# Altium PCB holoboard.PcbDoc
Units mil, origin at the board's own origin, x right, y up, seen from the top; angles counter-clockwise.
Board outline 3937.01 x 3937.01 mil, 2 copper layers (Top Layer, Bottom Layer); 69 components, 62 nets, 320 pads, 0 vias.
Unrouted connection lines stored in the file: 10.
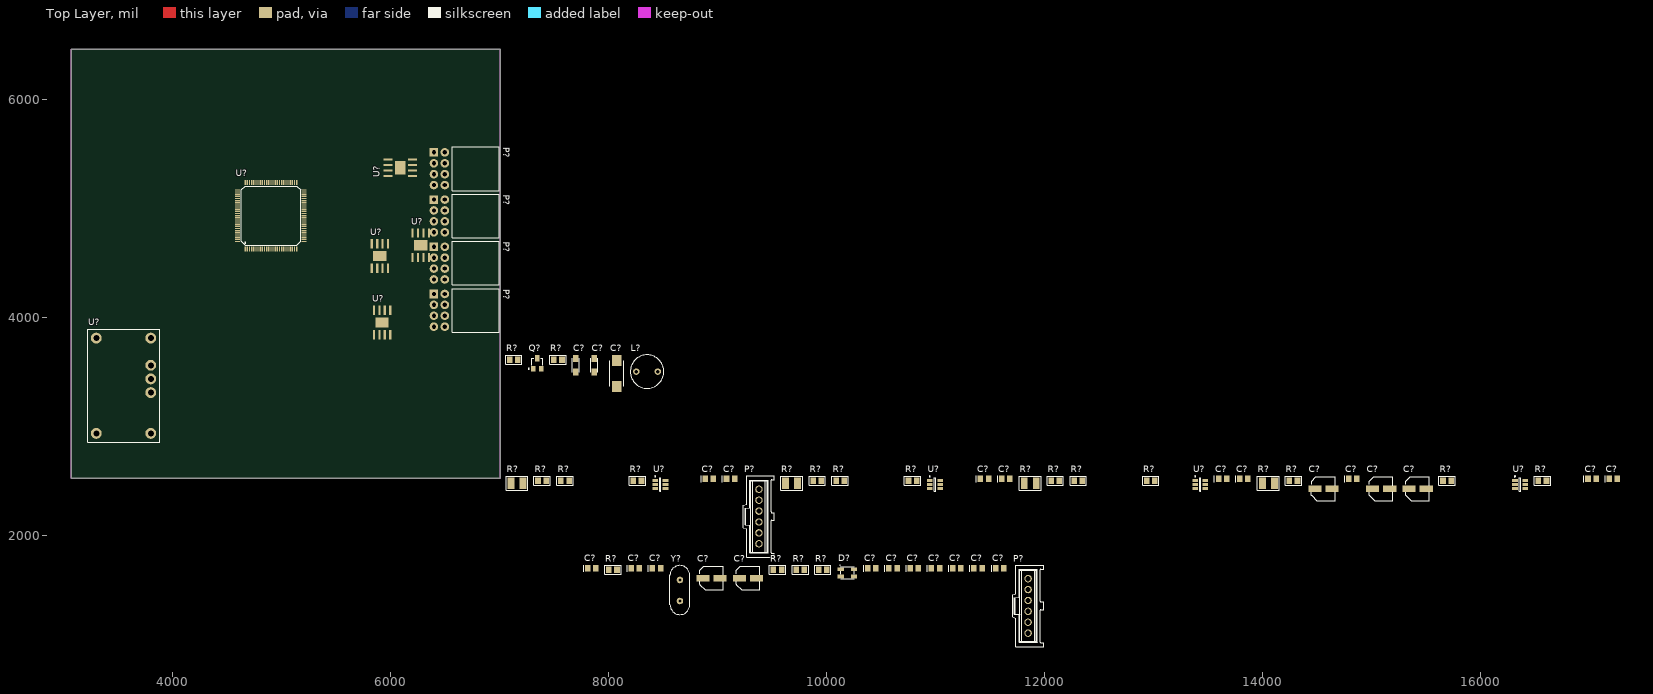
[diagram p0: Top Layer view]
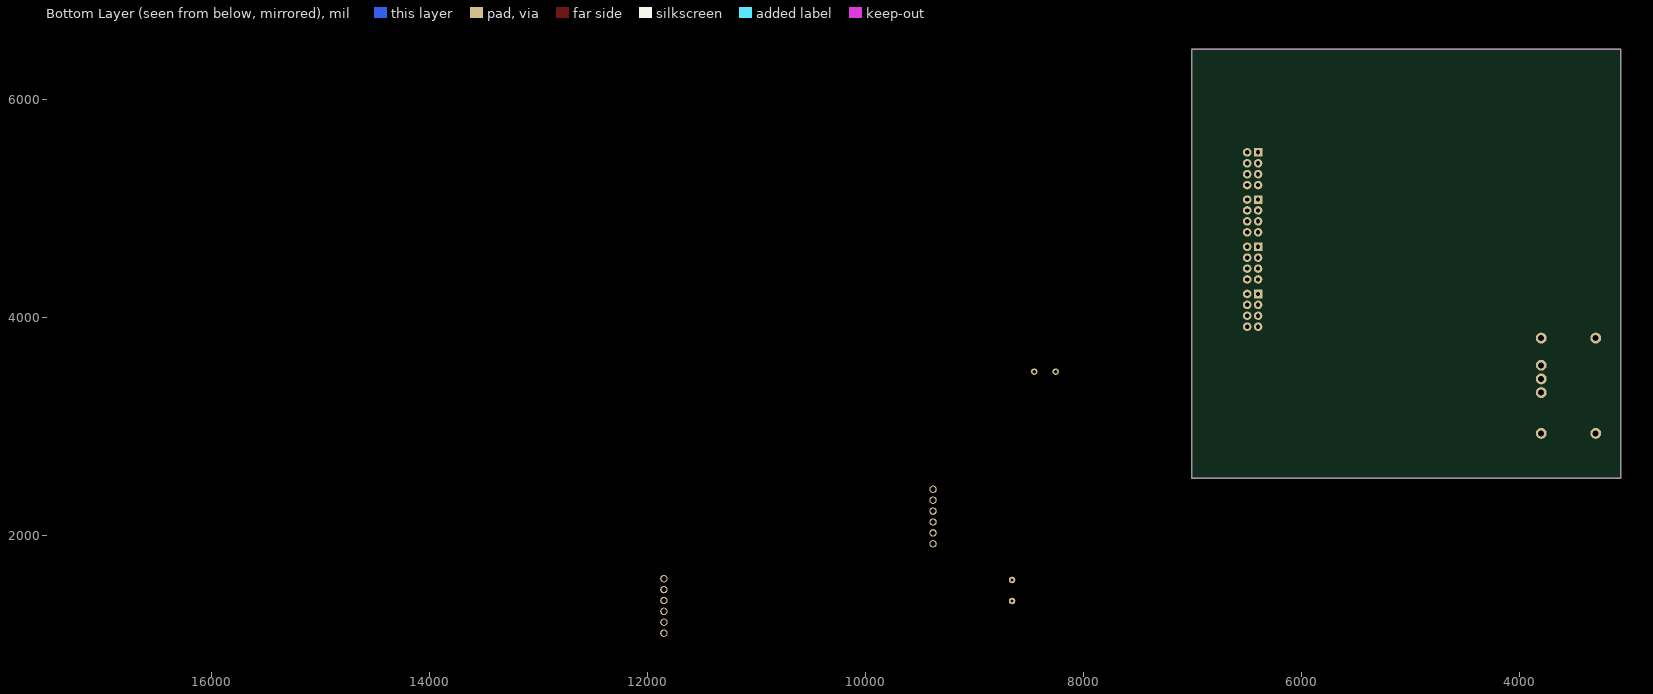
[diagram p1: Bottom Layer view, seen from below]

## Layer stack, top to bottom
Top Layer: signal copper 1.4
Dielectric: dielectric 12.6, FR-4, Dk 4.8
Bottom Layer: signal copper 1.4

## Board outline
3070.87,2519.68 7007.87,2519.68 7007.87,6456.69 3070.87,6456.69

## Design rules (kind name [scope] priority, off if disabled: settings)
Clearance [All] p1: gap=10
PolygonConnect [All] p1: connectstyle=Relief reliefconductorwidth=10 reliefentries=4 polygonreliefangle="90 Angle"
RoutingVias [All] p1: holewidth=28 width=50 viastyle="Through Hole" minholewidth=28 minwidth=50 maxholewidth=28 maxwidth=50
SilkscreenOverComponentPads [All] p1: minsilkscreentomaskgap=10
SolderMaskExpansion [All] p1: expansion=4
Width [All] p1: maxlimit=10 minlimit=10 preferedwidth=10
27 further rules are at their usual default settings.

## Classes and differential pairs
component class Holoboard: C? D? P? R? U? Y?
component class Holoboard_power_supply: C? L? Q? R? U?
component class Holoboard_motor_interface: C? P? R? U?

## Components (designator, comment, footprint, x,y, rotation, side; value= is the part's Value field where it differs from the comment)
C? "Cap" C0805 10415,1695 r0 top
C? "Cap" C0805 10805,1695 r0 top
C? "Cap" C0805 11000,1695 r0 top
C? "Cap" C0805 11195,1695 r0 top
C? "Cap" C0805 11390,1695 r0 top
C? "Cap" C0805 10610,1695 r0 top
C? "Cap" C0805 11590,1695 r0 top
C? "Cap Pol" "ALUMINIUM Boîtier B" 8945,1605 r0 top
C? "Cap Pol" "ALUMINIUM Boîtier B" 9280,1605 r0 top
C? "Cap" C0805 8245,1695 r0 top
C? "Cap" C0805 8440,1695 r0 top
C? "Cap" C0805 7845,1695 r0 top
C? "Cap" C0805 17025,2515 r0 top
C? "Cap" C0805 13830,2515 r0 top
C? "Cap" C0805 11645,2515 r0 top
C? "Cap" C0805 8925,2515 r0 top
C? "Cap" C0805 14830,2515 r0 top
C? "Cap Pol" "ALUMINIUM Boîtier B" 15090,2425 r0 top
C? "Cap" C0805 13635,2515 r0 top
C? "Cap" C0805 11450,2515 r0 top
C? "Cap" C0805 9120,2515 r0 top
C? "Cap" C0805 17220,2515 r0 top
C? "Cap Pol" "ALUMINIUM Boîtier B" 14560,2425 r0 top
C? "Cap Pol" "ALUMINIUM Boîtier B" 15425,2425 r0 top
C? "Cap Pol" "Boitier tantale C" 8075,3365 r90 top
C? "Cap" "Boitier tantale A" 7700,3495 r90 top
C? "Cap" "Boitier tantale A" 7870,3495 r90 top
D? "CLV1A-FKB" "WL-SFTW SMD" 10130,1620 r0 top
L? "Inductor" 744772010 8255,3500 r0 top
P? "SWD" "Connecteur 6pts" 11850,1600 r90 top
P? "Header 4X2" 114-15030 6397.64,5078.74 r270 top
P? "Header 4X2" 114-15030 6397.64,4645.67 r270 top
P? "Header 4X2" 114-15030 6397.64,4212.6 r270 top
P? "Header 4X2" 114-15030 6397.64,5511.81 r270 top
P? "JTAG" "Connecteur 6pts" 9380,2420 r90 top
Q? "SSM3K15FS" SOT-23 7345,3575 r0 top
R? "Res2" 0805 8040,1680 r0 top
R? "Res2" 0805 9760,1680 r0 top
R? "Res2" 0805 9965,1680 r0 top
R? "Res2" 0805 9550,1680 r0 top
R? "Res2" 0805 12975,2500 r0 top
R? "Res2" 0805 12310,2500 r0 top
R? "Res2" 0805 12100,2500 r0 top
R? "Res2" 1210 11870,2475 r0 top
R? "Res2" 0805 10790,2500 r0 top
R? "Res2" 0805 10125,2500 r0 top
R? "Res2" 0805 9915,2500 r0 top
R? "Res2" 1210 9680,2475 r0 top
R? "Res2" 0805 8265,2500 r0 top
R? "Res2" 0805 7600,2500 r0 top
R? "Res2" 0805 7390,2500 r0 top
R? "Res2" 1210 7160,2475 r0 top
R? "Res2" 0805 16570,2500 r0 top
R? "Res2" 0805 15695,2500 r0 top
R? "Res2" 0805 14285,2500 r0 top
R? "Res2" 1210 14055,2475 r0 top
R? "Res2" 0805 7130,3610 r0 top
R? "Res2" 0805 7535,3610 r0 top
U? "STM32F746" LQFP100 4665.35,4625.98 r0 top
U? "SN74LVC2G06" SOT23-6_M 16365,2465 r0 top
U? "SN74LVC2G06" SOT23-6_M 13430,2465 r0 top
U? "SN74LVC2G06" SOT23-6_M 10995,2465 r0 top
U? "DRV8872" DDA 5826.77,4448.82 r90 top
U? "DRV8872" DDA 6200.79,4547.24 r90 top
U? "DRV8872" DDA 6200.79,5295.28 r180 top
U? "DRV8872" DDA 5846.46,3838.58 r90 top
U? "SN74LVC2G06" SOT23-6_M 8475,2465 r0 top
U? "PTN78060W" EUW 3799.21,2933.07 r90 top
Y? "16MHz" HC49US 8655,1495 r90 top

## Footprints (in the part's own frame and the unit in brackets; to place one, negate y for a bottom-side part, rotate by r counter-clockwise, add the part's x,y. Pads: shape width x height; smd on the part's side, far side on the other; paste and mask are expansions set on the pad)
114-15030 [mm]
  rect 2x2 hole 1: 1(0,0)
  round 2 hole 1: 2(0,2.54) 3(2.54,0) 4(2.54,2.54) 5(5.08,0) 6(5.08,2.54) 7(7.62,0) 8(7.62,2.54)
  silkscreen extent -1.27,4.32 8.89,15.28, body extent -1.29,-0.32 8.87,15.33, height 7.57
0805 [mm] "Chip Capacitor; Body 2.0 x 1.2 mm (LxW typ)"
  rect 1.3x1.5 smd: 1(-0.95,0) 2(0.95,0)
  silkscreen extent -1.9,-1.05 1.9,1.05, body extent -1.02,-0.57 0.98,0.68, height 0.78
1210 [mm]
  rect 1.6x2.7 smd: 1(-1.4,0) 2(1.4,0)
  silkscreen extent -2.54,-1.65 2.54,1.65
744772010 [mm]
  round 1.5 hole 0.8: 1(0,0) 2(5,0)
  silkscreen extent -1.4,-3.9 6.4,3.9, body extent -1.41,-3.91 6.41,3.91, height 9.5
"ALUMINIUM Boîtier B" [mm]
  rect 3.05x1.5 smd: 1(-2,0) 2(2,0)
  silkscreen extent -2.79,-2.75 2.75,2.75, body extent -2.8,-2.75 2.75,2.75, height 5.4
"Boitier tantale A" [mm]
  rect 1.6x1.3 smd: 1(0,0) 2(3.2,0)
  silkscreen extent 0,-0.8 3.2,0.8, body extent -0.8,-0.9 4,0.9, height 1.8
"Boitier tantale C" [mm]
  rect 2.6x2.2 smd: 1(0,0) 2(6,0)
  silkscreen extent 0,-1.6 6,1.6, body extent -0.8,-1.75 6.8,1.76, height 2.79
C0805 [mm] "Chip Capacitor; Body 2.0 x 1.2 mm (LxW typ)"
  rect 1.3x1.5 smd: 1(-0.95,0) 2(0.95,0)
  silkscreen extent -1.9,-0.75 -1.9,0.75, body extent -1,-0.62 1,0.63, height 0.78
"Connecteur 6pts" [mil]
  round 68 hole 48: 1(0,0) 2(-100,0) 3(-200,0) 4(-300,0) 5(-400,0) 6(-500,0)
  silkscreen extent -623,-142 124,142
DDA [mm] "PowerPAD PLASTIC SMALL-OUTLINE"
  rect 2.2x0.5 smd paste-0.05 mask+0.05: 1(0,0) 2(0,-1.27) 3(0,-2.54) 4(0,-3.81) 5(5.715,-3.81) 6(5.715,-2.54) 7(5.715,-1.27) 8(5.715,0)
  rect 2.4x3.1 smd paste-0.05 mask+0.275: PPAD(2.86,-1.9)
  body extent -0.24,-4.4 5.96,0.6, height 1.53
EUW [mil]
  round 100 hole 55: 1(0,500) 2(0,0) 3(375,0) 4(500,0) 5(625,0) 6(875,0) 7(875,500)
  silkscreen extent -80,-80 955,580, body extent -85,-85 960,585, height 315
HC49US [mil]
  round 60 hole 27.56: 1(-100,0) 2(92.91,0)
  silkscreen extent -224,-92 226,92, body extent -224,-91 225,91, height 118
LQFP100 [mm] "14 x 14 mm 100-pin low-profile"
  rect 0.3x1.2 smd paste-0.05 mask+0.05: 1(0,0) 2(0.5,0) 3(1,0) 4(1.5,0) 5(2,0) 6(2.5,0) 7(3,0) 8(3.5,0) 9(4,0) 10(4.5,0) 11(5,0) 12(5.5,0) 13(6,0) 14(6.5,0) 15(7,0) 16(7.5,0) 17(8,0) 18(8.5,0) 19(9,0) 20(9.5,0) 21(10,0) 22(10.5,0) 23(11,0) 24(11.5,0) 25(12,0) 51(12,15.5) 52(11.5,15.5) 53(11,15.5) 54(10.5,15.5) 55(10,15.5) 56(9.5,15.5) 57(9,15.5) 58(8.5,15.5) 59(8,15.5) 60(7.5,15.5) 61(7,15.5) 62(6.5,15.5) 63(6,15.5) 64(5.5,15.5) 65(5,15.5) 66(4.5,15.5) 67(4,15.5) 68(3.5,15.5) 69(3,15.5) 70(2.5,15.5) 71(2,15.5) 72(1.5,15.5) 73(1,15.5) 74(0.5,15.5) 75(0,15.5)
  rect 1.2x0.3 smd paste-0.05 mask+0.05: 26(13.75,1.75) 27(13.75,2.25) 28(13.75,2.75) 29(13.75,3.25) 30(13.75,3.75) 31(13.75,4.25) 32(13.75,4.75) 33(13.75,5.25) 34(13.75,5.75) 35(13.75,6.25) 36(13.75,6.75) 37(13.75,7.25) 38(13.75,7.75) 39(13.75,8.25) 40(13.75,8.75) 41(13.75,9.25) 42(13.75,9.75) 43(13.75,10.25) 44(13.75,10.75) 45(13.75,11.25) 46(13.75,11.75) 47(13.75,12.25) 48(13.75,12.75) 49(13.75,13.25) 50(13.75,13.75) 76(-1.75,13.75) 77(-1.75,13.25) 78(-1.75,12.75) 79(-1.75,12.25) 80(-1.75,11.75) 81(-1.75,11.25) 82(-1.75,10.75) 83(-1.75,10.25) 84(-1.75,9.75) 85(-1.75,9.25) 86(-1.75,8.75) 87(-1.75,8.25) 88(-1.75,7.75) 89(-1.75,7.25) 90(-1.75,6.75) 91(-1.75,6.25) 92(-1.75,5.75) 93(-1.75,5.25) 94(-1.75,4.75) 95(-1.75,4.25) 96(-1.75,3.75) 97(-1.75,3.25) 98(-1.75,2.75) 99(-1.75,2.25) 100(-1.75,1.75)
  silkscreen extent -0.9,0.85 12.9,14.65, body extent -2,-0.25 14,15.75, height 1.6
SOT23-6_M [mm] "SOT23, 6-Leads, Body 2.9x1.6mm, Pitch 0.95mm, Lead Span 2.7mm, IPC Low Density"
  rect 1.3x0.7 smd: 1(-1.2,0.95) 2(-1.2,0) 3(-1.2,-0.95) 4(1.2,-0.95) 5(1.2,0) 6(1.2,0.95)
  silkscreen extent -1.32,-1.55 0.15,1.97, body extent -1.47,-1.52 1.53,1.48, height 1.3
SOT-23 [mm] "SOT-23; 3 Leads; Body 3.0 x 2.6 mm, inc. leads (LxW max)"
  rect 1x1.2 smd: 1(-0.95,-1.25) 2(0.95,-1.25)
  rect 1x1.5 smd: 3(0,1.25)
  silkscreen extent -2.07,-1.37 1.3,1.25, body extent -1.5,-1.15 1.5,1.35, height 1.05
"WL-SFTW SMD" [mm]
  rect 1.5x0.9 smd: 1(3.1,1.7) 2(3.1,0) 3(0,1.7) 4(0,0)
  silkscreen extent -0.17,-0.55 3.17,2.64

## Part data
C? C? C? C? C? C? C? C? C? C? C? C? C? C? C? C? C? C? C? C? C?: "Capacitor"
C? C? C? C? C? C?: "Polarized Capacitor"
P? P?: library part "Header 6", "Header, 6-Pin"
P? P? P? P?: "Header, 4-Pin, Dual row"
Q?: library part NMOS-2, "N-Channel Power MOSFET"
R? R? R? R? R? R? R? R? R? R? R? R? R? R? R? R? R? R? R? R? R? R?: "Resistor"
U? U? U? U?: "3.6A Brushed  DC Motor  Driver  With Fault Reporting"
Y?: library part XTAL, "Crystal Oscillator"

## Nets (pads, with @x,y where several pads share a name; then routed paths per layer and width w, separated by ;. In a path a pad name is that pad's centre, name@x,y a point inside that pad or via, vN(x,y) a via of type N, cw(c..) or ccw(c..) an arc to the next point about the centre after c; other vN are vias at no path point)
3V3: U?.15 U?.18 U?.19 U?.31 U?.50 U?.75 U?.100
5V: 
BOOT0: U?.94
GND: D?.2 Q?.3 U?.7@4783.46,4625.98 U?.22
"JTAG EN": U?.26
LED_B: 
LED_G: 
LED_R: 
MOT0_CHA: U?.32
MOT0_CHB: U?.30
MOT0_F\A\U\L\T\: 
MOT0_IN1: U?.29
MOT0_IN2: U?.28
MOT0_OUT+: 
MOT0_OUT-: 
MOT1_CHA: U?.27
MOT1_CHB: U?.25
MOT1_F\A\U\L\T\: 
MOT1_IN1: U?.23
MOT1_IN2: U?.21
MOT1_OUT+: 
MOT1_OUT-: 
MOT2_CHA: 
MOT2_CHB: U?.16
MOT2_F\A\U\L\T\: 
MOT2_IN1: U?.17
MOT2_IN2: 
MOT2_OUT+: 
MOT2_OUT-: 
MOT3_CHA: U?.11
MOT3_CHB: U?.10
MOT3_F\A\U\L\T\: 
MOT3_IN1: 
MOT3_IN2: 
MOT3_OUT+: 
MOT3_OUT-: 
MOT4_OUT+: U?.6@4763.78,4625.98
MOT4_OUT-: 
NetC?_1: U?.48
NetC?_2: L?.2
NetD?_1: D?.1
NetD?_3: D?.3
NetD?_4: D?.4
NetP?_3: P?.3@11850,1400
NetP?_5: 
NetQ?_1: Q?.1 R?.1@8002.6,1680
NetQ?_2: Q?.2 U?.3@4704.72,4625.98
NetR?_2: R?.2@8077.4,1680
NetU?_2: U?.2@4685.04,4625.98 U?.20
NetU?_4: U?.4@4724.41,4625.98
NetU?_5: 
NetU?_8: U?.8@4803.15,4625.98
NetU?_9: U?.9
NRST: P?.5@11850,1200 U?.14
OSC_IN: U?.12 Y?.2
OSC_OUT: C?.2@10452.4,1695 U?.13 Y?.1
SWD_SWCLK: P?.2@11850,1500
SWD_SWDIO: P?.4@11850,1300
SWD_SWO: 
TDO: P?.6@11850,1100
Vcc: 
VMOT: C?.1@10377.6,1695 P?.1@11850,1600 U?.1@4665.35,4625.98 U?.5@4744.09,4625.98
pads on no net: C?.1@7700,3495 C?.1@7807.6,1695 C?.1@7870,3495 C?.1@8075,3365 C?.1@8207.6,1695 C?.1@8402.6,1695 C?.1@8866.26,1605 C?.1@8887.6,2515 C?.1@9082.6,2515 C?.1@9201.26,1605 C?.1@10572.6,1695 C?.1@10767.6,1695 C?.1@10962.6,1695 C?.1@11157.6,1695 C?.1@11352.6,1695 C?.1@11412.6,2515 C?.1@11552.6,1695 C?.1@11607.6,2515 C?.1@13597.6,2515 C?.1@13792.6,2515 C?.1@14481.26,2425 C?.1@14792.6,2515 C?.1@15011.26,2425 C?.1@15346.26,2425 C?.1@16987.6,2515 C?.1@17182.6,2515 C?.2@7700,3620.98 C?.2@7870,3620.98 C?.2@7882.4,1695 C?.2@8075,3601.22 C?.2@8282.4,1695 C?.2@8477.4,1695 C?.2@8962.4,2515 C?.2@9023.74,1605 C?.2@9157.4,2515 C?.2@9358.74,1605 C?.2@10647.4,1695 C?.2@10842.4,1695 C?.2@11037.4,1695 C?.2@11232.4,1695 C?.2@11427.4,1695 C?.2@11487.4,2515 C?.2@11627.4,1695 C?.2@11682.4,2515 C?.2@13672.4,2515 C?.2@13867.4,2515 C?.2@14638.74,2425 C?.2@14867.4,2515 C?.2@15168.74,2425 C?.2@15503.74,2425 C?.2@17062.4,2515 C?.2@17257.4,2515 L?.1 P?.1@6397.64,4212.6 P?.1@6397.64,4645.67 P?.1@6397.64,5078.74 P?.1@6397.64,5511.81 P?.1@9380,2420 P?.2@6497.64,4212.6 P?.2@6497.64,4645.67 P?.2@6497.64,5078.74 P?.2@6497.64,5511.81 P?.2@9380,2320 P?.3@6397.64,4112.6 P?.3@6397.64,4545.67 P?.3@6397.64,4978.74 P?.3@6397.64,5411.81 P?.3@9380,2220 P?.4@6497.64,4112.6 P?.4@6497.64,4545.67 P?.4@6497.64,4978.74 P?.4@6497.64,5411.81 P?.4@9380,2120 P?.5@6397.64,4012.6 P?.5@6397.64,4445.67 P?.5@6397.64,4878.74 P?.5@6397.64,5311.81 P?.5@9380,2020 P?.6@6497.64,4012.6 P?.6@6497.64,4445.67 P?.6@6497.64,4878.74 P?.6@6497.64,5311.81 P?.6@9380,1920 P?.7 P?.8 R?.1@7092.6,3610 R?.1@7104.88,2475 R?.1@7352.6,2500 R?.1@7497.6,3610 R?.1@7562.6,2500 R?.1@8227.6,2500 R?.1@9512.6,1680 R?.1@9624.88,2475 R?.1@9722.6,1680 R?.1@9877.6,2500 R?.1@9927.6,1680 R?.1@10087.6,2500 R?.1@10752.6,2500 R?.1@11814.88,2475 R?.1@12062.6,2500 R?.1@12272.6,2500 R?.1@12937.6,2500 R?.1@13999.88,2475 R?.1@14247.6,2500 R?.1@15657.6,2500 R?.1@16532.6,2500 R?.2@7167.4,3610 R?.2@7215.12,2475 R?.2@7427.4,2500 R?.2@7572.4,3610 R?.2@7637.4,2500 R?.2@8302.4,2500 R?.2@9587.4,1680 R?.2@9735.12,2475 R?.2@9797.4,1680 R?.2@9952.4,2500 R?.2@10002.4,1680 R?.2@10162.4,2500 R?.2@10827.4,2500 R?.2@11925.12,2475 R?.2@12137.4,2500 R?.2@12347.4,2500 R?.2@13012.4,2500 R?.2@14110.12,2475 R?.2@14322.4,2500 R?.2@15732.4,2500 R?.2@16607.4,2500 U?.1@3299.21,2933.07 U?.1@5826.77,4448.82 U?.1@5846.46,3838.58 U?.1@6200.79,4547.24 U?.1@6200.79,5295.28 U?.1@8427.76,2502.4 U?.1@10947.76,2502.4 U?.1@13382.76,2502.4 U?.1@16317.76,2502.4 U?.2@3799.21,2933.07 U?.2@5876.77,4448.82 U?.2@5896.46,3838.58 U?.2@6200.79,5345.28 U?.2@6250.79,4547.24 U?.2@8427.76,2465 U?.2@10947.76,2465 U?.2@13382.76,2465 U?.2@16317.76,2465 U?.3@3799.21,3308.07 U?.3@5926.77,4448.82 U?.3@5946.46,3838.58 U?.3@6200.79,5395.28 U?.3@6300.79,4547.24 U?.3@8427.76,2427.6 U?.3@10947.76,2427.6 U?.3@13382.76,2427.6 U?.3@16317.76,2427.6 U?.4@3799.21,3433.07 U?.4@5976.77,4448.82 U?.4@5996.46,3838.58 U?.4@6200.79,5445.28 U?.4@6350.79,4547.24 U?.4@8522.24,2427.6 U?.4@11042.24,2427.6 U?.4@13477.24,2427.6 U?.4@16412.24,2427.6 U?.5@3799.21,3558.07 U?.5@5975.79,5445.28 U?.5@5976.77,4673.82 U?.5@5996.46,4063.58 U?.5@6350.79,4772.24 U?.5@8522.24,2465 U?.5@11042.24,2465 U?.5@13477.24,2465 U?.5@16412.24,2465 U?.6@3799.21,3808.07 U?.6@5926.77,4673.82 U?.6@5946.46,4063.58 U?.6@5975.79,5395.28 U?.6@6300.79,4772.24 U?.6@8522.24,2502.4 U?.6@11042.24,2502.4 U?.6@13477.24,2502.4 U?.6@16412.24,2502.4 U?.7@3299.21,3808.07 U?.7@5876.77,4673.82 U?.7@5896.46,4063.58 U?.7@5975.79,5345.28 U?.7@6250.79,4772.24 U?.8@5826.77,4673.82 U?.8@5846.46,4063.58 U?.8@5975.79,5295.28 U?.8@6200.79,4772.24 U?.24 U?.33 U?.34 U?.35 U?.36 U?.37 U?.38 U?.39 U?.40 U?.41 U?.42 U?.43 U?.44 U?.45 U?.46 U?.47 U?.49 U?.51 U?.52 U?.53 U?.54 U?.55 U?.56 U?.57 U?.58 U?.59 U?.60 U?.61 U?.62 U?.63 U?.64 U?.65 U?.66 U?.67 U?.68 U?.69 U?.70 U?.71 U?.72 U?.73 U?.74 U?.76 U?.77 U?.78 U?.79 U?.80 U?.81 U?.82 U?.83 U?.84 U?.85 U?.86 U?.87 U?.88 U?.89 U?.90 U?.91 U?.92 U?.93 U?.95 U?.96 U?.97 U?.98 U?.99 U?.PPAD

## Keep-outs
Keep-Out Layer:
  the board outline again, w3.94

## Dimensions
7007.87,6456.69 to 3070.87,6456.69 on Drill Drawing
7007.87,6456.69 to 7007.87,2519.68 on Drill Drawing